# EAGLE board servodengen (EAGLE 9.6.2)
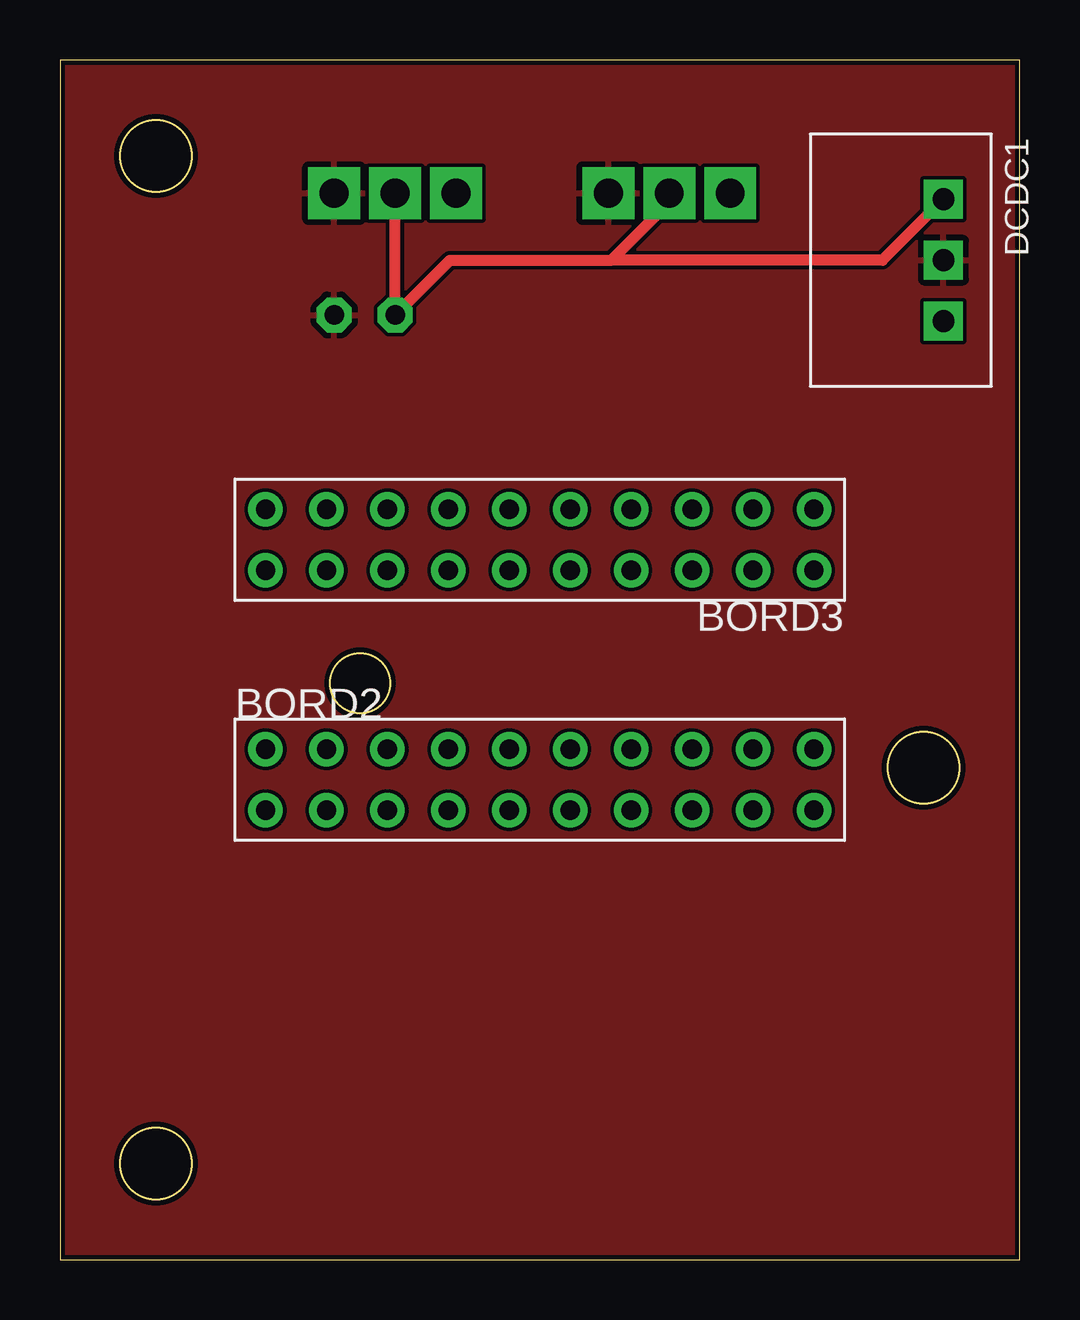
[diagram p0: board, top side]
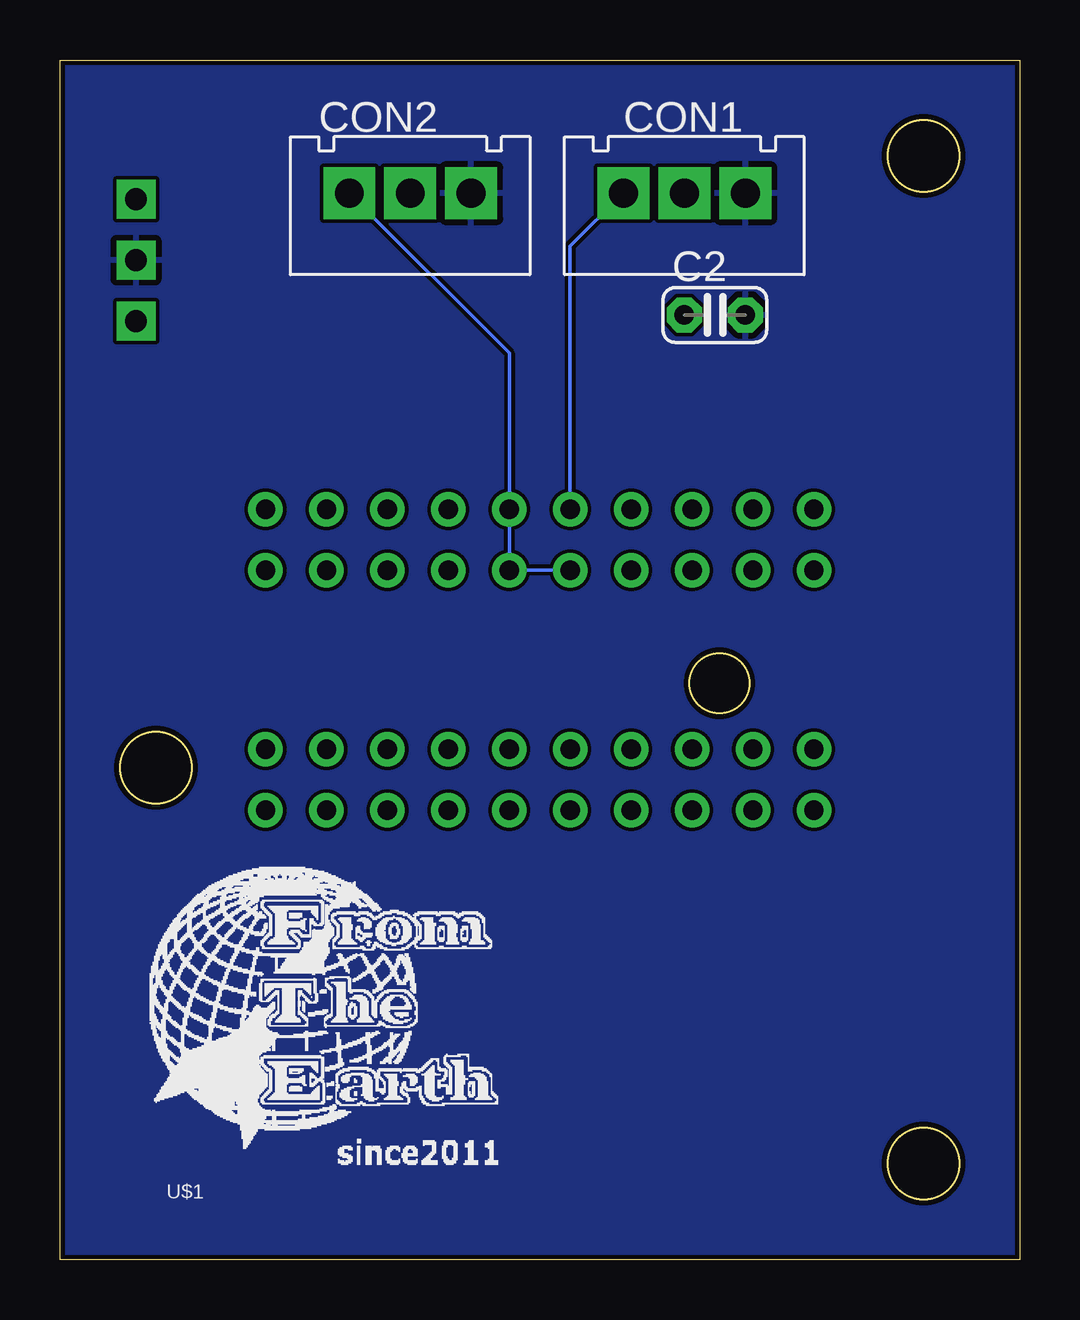
[diagram p1: board, bottom side, seen from below]

Size 40 x 50 mm. Coordinates in mm from the lower left corner, seen from the top.
Outline: 0,0 40,0 40,50 0,50 0,0
Outline: circle at 36,20.5 radius 1.5
Outline: circle at 4,46 radius 1.5
Outline: circle at 4,4 radius 1.5
Outline: circle at 12.51,24.02 radius 1.25
Copper layers (1*16): Top 0.035mm / dielectric 1.6mm / Bottom 0.035mm
Design rules "jlcpcb-2layers": minimum track width 5mil, minimum drill 0.3mm, track to track 5mil, track to pad 5mil, pad to pad 5mil, via to via 5mil, smd to smd 5mil, copper to edge 0.2mm, drill to drill 6mil, minimum pad ring 10mil, minimum via ring 3mil, stop-mask expansion 4mil, vias tented up to drill 0mil, thermal gap 10mil
Net classes: 1 SIGNAL: width 0.152 mm, drill 0.152 mm, clearance 0.152 mm; 2 POWER_H: width 0.457 mm, drill 0.152 mm, clearance 0.152 mm; 3 POWER_L: width 0.305 mm, drill 0.152 mm, clearance 0.152 mm; 4 GND: width 0.305 mm, drill 0.152 mm, clearance 0.152 mm

## Footprints (pad centres in the part's own frame; a part is rotated, then mirrored left to right if it is on the bottom)
2X10 = drill 0.8: P$1 0,1.27; P$2 0,-1.27; P$3 -2.54,1.27; P$4 -2.54,-1.27; P$5 -5.08,1.27; P$6 -5.08,-1.27; P$7 -7.62,1.27; P$8 -7.62,-1.27; P$9 -10.16,1.27; P$10 -10.16,-1.27; P$11 -12.7,1.27; P$12 -12.7,-1.27; P$13 -15.24,1.27; P$14 -15.24,-1.27; P$15 -17.78,1.27; P$16 -17.78,-1.27; P$17 -20.32,1.27; P$18 -20.32,-1.27; P$19 -22.86,1.27; P$20 -22.86,-1.27
C025-024X044 = drill 0.813 octagon: 1 -1.27,0; 2 1.27,0
3PIN = drill 1.2 square: P$1 2.54,-2.54; P$2 5.08,-2.54; P$3 7.62,-2.54
5V1A_M78AR05-1 = drill 0.9 pad 1.27 square: GND 0,0; VIN 2.54,0; VOUT -2.54,0

## Placement (x,y rotation side)
BORD2  [2X10]  31.43,20 0 top
BORD3  [2X10]  8.57,30 180 top
C2  3.3uF  [C025-024X044]  12.7,39.37 0 bottom
CON1  [3PIN]  19.05,46.99 0 bottom
CON2  [3PIN]  30.48,46.99 0 bottom
DCDC1  [5V1A_M78AR05-1]  36.83,41.66 270 top
U$1  F.T.E.LOGO  [LOGO]  36.83,2.54 0 bottom

## Library data of the parts
BORD2 BORD3 = PinSocket
C2 = rcl; SPICEPREFIX: C
CON1 CON2 = XR Connector
DCDC1 = DC-DC
U$1 = logo

## Nets
+5V [POWER_H]: C2.1 CON1.P$2 CON2.P$2 DCDC1.VOUT
GND [GND]: C2.2 CON1.P$3 CON2.P$3 DCDC1.GND
RAW [SIGNAL]: DCDC1.VIN
SERVO1 [SIGNAL]: BORD3.P$10 CON1.P$1
SERVO2 [SIGNAL]: BORD3.P$9 BORD3.P$11 BORD3.P$12 CON2.P$1

## Tracks (layer width: path | path; a pad name or v marks a point on that pad's centre or on a via)
+5V
  Top 0.457: CON1.P$2 C2.1 16.26,41.66 22.99,41.66 | DCDC1.VOUT 34.29,41.66 22.99,41.66 | CON2.P$2 25.4,44.07 22.99,41.66
GND
  pour Top: 48.26,0 41.91,-6.35 0,-6.35 -7.62,1.27 -7.62,50.8 -6.35,52.07 -2.54,55.88 39.37,55.88 48.26,46.99 48.26,1.27
  pour Bottom: 0,-6.35 -7.62,1.27 -7.62,49.53 -7.62,50.8 -2.54,55.88 39.37,55.88 48.26,46.99 48.26,0 41.91,-6.35
SERVO1
  Bottom 0.152: CON1.P$1 18.73,42.23 BORD3.P$10
SERVO2
  Bottom 0.152: BORD3.P$9 BORD3.P$11 BORD3.P$12 21.27,31.75 21.27,37.78 CON2.P$1